# Altium PCB PCB1.PcbDoc
Units mm, origin at the board's own origin, x right, y up, seen from the top; angles counter-clockwise.
Board outline 63.4 x 39.3 mm, 2 copper layers (Top Layer, Bottom Layer); 18 components, 24 nets, 78 pads, 2 vias.
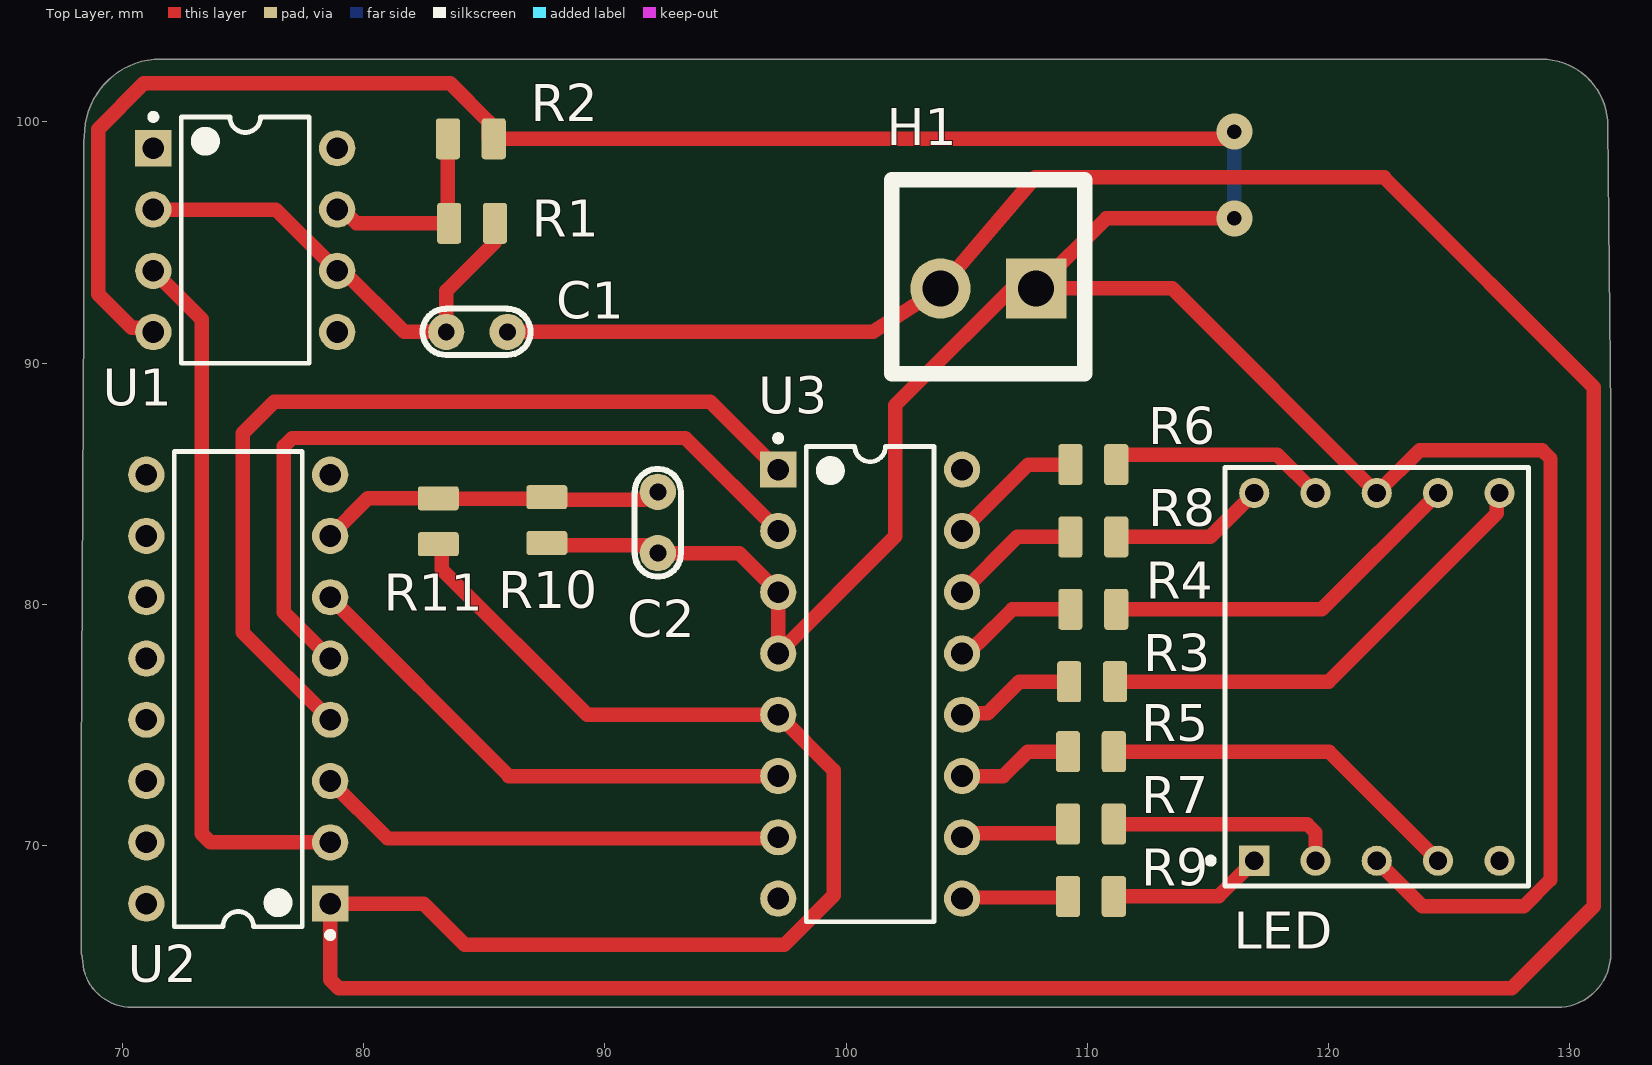
[diagram p0: Top Layer view]
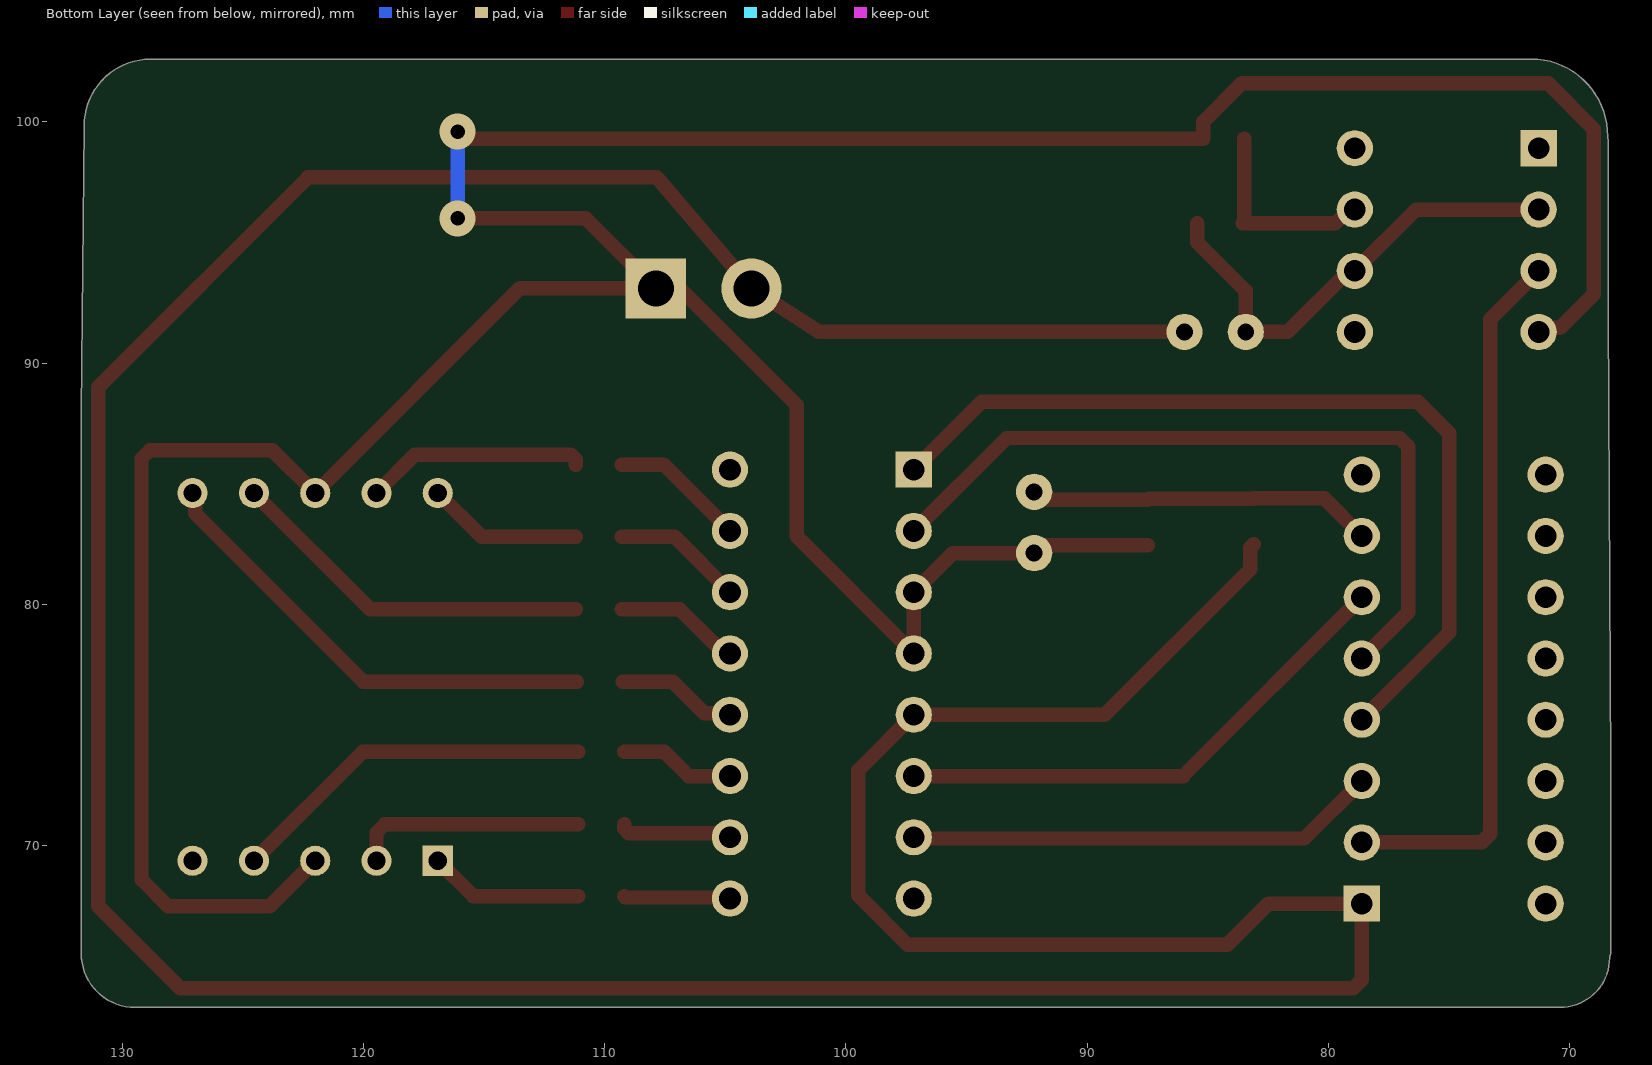
[diagram p1: Bottom Layer view, seen from below]
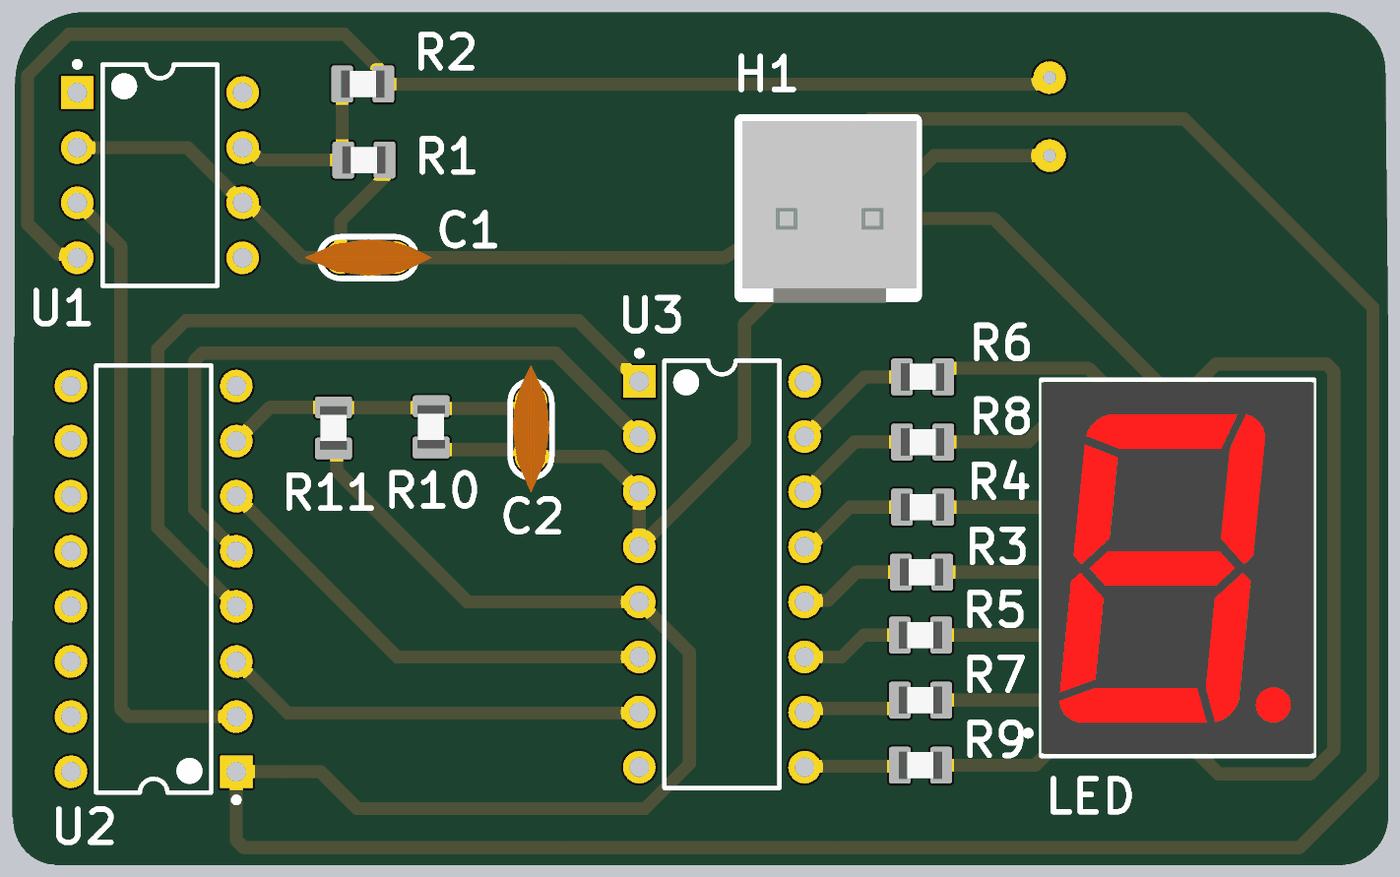
[diagram p2: 3D render of the assembled board from above, using the file's embedded part models]

## Layer stack, top to bottom
Top Solder: solder mask 0.0102, Solder Resist, Dk 3.5
Top Layer: signal copper 0.0356
Dielectric 1: dielectric 0.32, FR-4, Dk 4.8
Bottom Layer: signal copper 0.0356
Bottom Solder: solder mask 0.0102, Solder Resist, Dk 3.5

## Board outline
68.3,65.519 68.3,73.249 68.4,92.048 68.4,92.05 68.4,99.26 ccw(c68.135,99.4) 68.435,99.4 68.435,99.403 cw(c71.623,99.426) 71.328,102.601 71.4,102.6 128.826,102.6 cw(c128.826,99.846) 131.579,99.846 131.579,99.843 131.7,87.998 131.7,65.54 cw(c129.46,65.54) 129.46,63.3 70.405,63.3 cw(c70.405,65.357) 68.348,65.357 ccw(c68.047,65.357)

## Design rules (kind name [scope] priority, off if disabled: settings)
Clearance [All] p1: gap=0.254 ignorepadtopadclearanceinfootprint=FALSE
PolygonConnect [All] p1: connectstyle=Relief reliefconductorwidth=0.254 reliefentries=4 polygonreliefangle="90 Angle" airgapwidth=0.254
RoutingVias [All] p1: holewidth=0.711 width=1.27 viastyle="Through Hole" minholewidth=0.711 minwidth=1.27 maxholewidth=0.711 maxwidth=1.27
SolderMaskExpansion [All] p1: expansion=0.102 istentingtop=FALSE
SupplyNets "Schematic Supply Nets_1" [InNet('VCC')] p1: voltage=0.000
SupplyNets "Schematic Supply Nets" [InNet('GND')] p2: voltage=0.000
Width [All] p1: maxlimit=0.6 minlimit=0.6 preferedwidth=0.6
30 further rules are at their usual default settings.

## Classes and differential pairs
component class Sheet1: C1 C2 LED R2 R3 R4 R5 R6 R7 R8 R9 R10 R11 U1 U2 U3

## Components (designator, comment, footprint, x,y, rotation, side; value= is the part's Value field where it differs from the comment)
C1 "4.7uF" "tu gom" 84.7,91.3 r0 top
C2 "4.7uF" "tu gom" 92.2,83.4 r90 top
H1 "Header Duc Thang" VH3.96M-2 105.9,93.1 r180 top
LED "LED" FP-HDSP-H153-MFG 122,77 r0 top (schematic designator DS1)
R1 "82K" RES_0805 84.5,95.8 r0 top
R2 "1.5K" RES_0805 84.45,99.3 r0 top
R3 "470" RES_0805 110.2,76.8 r0 top
R4 "470" RES_0805 110.25,79.8 r0 top
R5 "470" RES_0805 110.15,73.9 r180 top
R6 "470" RES_0805 110.25,85.8 r0 top
R7 "470" RES_0805 110.15,70.9 r180 top
R8 "470" RES_0805 110.25,82.8 r0 top
R9 "470" RES_0805 110.15,67.9 r180 top
R10 "32K" RES_0805 87.6,83.5 r270 top
R11 "6.8K" RES_0805 83.1,83.45 r90 top
U1 "LM55" P0008A 75.1,95.1 r0 top
U2 "4518" N0016A 74.81,76.49 r180 top
U3 "7447" N0016A 101,76.7 r0 top

## Footprints (in the part's own frame and the unit in brackets; to place one, negate y for a bottom-side part, rotate by r counter-clockwise, add the part's x,y. Pads: shape width x height; smd on the part's side, far side on the other; paste and mask are expansions set on the pad)
FP-HDSP-H153-MFG [mm]
  rect 1.25x1.25 hole 0.75 paste-2539.97 mask+0: 1(-5.08,-7.62)
  round 1.25 hole 0.75 paste-2539.97 mask+0: 2(-2.54,-7.62) 3(0,-7.62) 4(2.54,-7.62) 5(5.08,-7.62) 6(5.08,7.62) 7(2.54,7.62) 8(0,7.62) 9(-2.54,7.62) 10(-5.08,7.62)
  silkscreen extent -7.01,-8.68 6.29,8.68, body extent -6.39,-8.77 6.39,8.77, height 0.25
N0016A [mm] "DIP, 16-Leads, Body 19.7x6.6mm, Pitch 2.54mm"
  rect 1.5x1.5 hole 0.9: 1(-3.81,8.89)
  round 1.5 hole 0.9: 2(-3.81,6.35) 3(-3.81,3.81) 4(-3.81,1.27) 5(-3.81,-1.27) 6(-3.81,-3.81) 7(-3.81,-6.35) 8(-3.81,-8.89) 9(3.81,-8.89) 10(3.81,-6.35) 11(3.81,-3.81) 12(3.81,-1.27) 13(3.81,1.27) 14(3.81,3.81) 15(3.81,6.35) 16(3.81,8.89)
  silkscreen extent -3.94,-9.85 2.65,10.31, body extent -3.95,-9.85 3.95,9.85, height 5.08
P0008A [mm] "DIP, 8-Leads, Body 10.15x6.6mm, Pitch 2.54mm"
  rect 1.5x1.5 hole 0.9: 1(-3.81,3.81)
  round 1.5 hole 0.9: 2(-3.81,1.27) 3(-3.81,-1.27) 4(-3.81,-3.81) 5(3.81,-3.81) 6(3.81,-1.27) 7(3.81,1.27) 8(3.81,3.81)
  silkscreen extent -3.93,-5.1 2.65,5.23, body extent -3.95,-5.07 3.95,5.07, height 5.08
RES_0805 [mm]
  rrect25% 1x1.7 smd: 1(-0.95,0) 2(0.95,0)
  body extent -1,-0.63 1,0.63, height 0.47
"tu gom" [mm] "Tu gom mini"
  round 1.5 hole 0.7: 1(-1.27,0) 2(1.27,0)
  silkscreen extent -2.25,-0.97 2.22,0.97, body extent -2.92,-0.85 2.92,0.85, height 6.12
VH3.96M-2 [mm]
  rect 2.5x2.5 hole 1.5: 1(-1.98,0)
  round 2.5 hole 1.5: 2(1.98,0)
  silkscreen extent -4,-4.5 4,3.54, body extent -4.08,-4.49 3.96,3.88, height 10.26

## Part data
C1 C2: library part "Tu gom 472 50V", "Cắm", Chung_Loai=Cắm, Don_Vi=Con, Ma_Hang=MH004777, So_Chan=2, Ten_Linh_Kien="Tụ gốm 472-4.7nF 50V"
H1: library part "Header 2P VH3.96 Duc Thang", "Cắm", Chung_Loai=Cắm, Don_Vi=Con, Ma_Hang=MH001283, Ten_Linh_Kien="Header 2P XH2.54-2P Đực Thẳng"
LED: library part CMP-18395-000002-1, "LED 7-SEG 14.2MM CC RED RHD RHD", Forward Current=100mA, Forward Voltage=2V, Manufacturer=Broadcom, Manufacturer Part Number=HDSP-H153, Power Dissipation=96mW, Reverse Voltage=15V, Temperature="-20°C to +100°C", Temperature Range High=+100°C, Temperature Range Low=-20°C, Automotive=No, Category=Disp, ComponentLink2Description=Datasheet, ComponentLink2URL=https://docs.broadcom.com/docs/AV02-1107EN, Device Class L1=Optoelectronics, Device Class L2=Displays, Device Class L3="LED Displays", Digikey Description="LED 7-SEG 14.2MM CC RED RHD RHD", Display Type=LED, Element Config="Common Cathode", Height=8mm, Lead Free=Yes, Luminous Intensity=16mcd, Octopart=https://octopart.com/hdsp-h153-broadcom-71129578, Package=HDSP-H153, RoHS=TRUE, Standoff Height=1.14mm, Test Current=100mA, Viewing Angle=100°, Wavelength=637nm
R1 R2 R3 R4 R5 R6 R7 R8 R9 R10 R11: library part RES_0805, "Resistor SMD 0805"
U1: library part CMP-2000-04954-1, "Precision Timer, 4.5 to 16 V, 0 to 70 degC, 8-Pin DIP, Pb-Free, Tube", Manufacturer=TexasInstruments, Maximum High Level Output Current=-200mA, Maximum Low Level Output Current=200mA, Operating Supply Voltage=5, Package=8PDIP, Package Description="8-Pin Double In-line Package, Body 9.59 x 6.35 mm, Pitch 2.54 mm", Package Reference=P8, Category=Timer, Datasheet URL=http://www.ti.com/general/docs/lit/getliterature.tsp?genericPartNumber=NE555&fileType=pdf, Datasheet Version="Rev. I, 09/2014", Manufacturer URL=http://www.ti.com/, Number of Internal Timers=1, Package URL=http://www.ti.com/lit/ml/mpdi001b/mpdi001b.pdf, Packaging=Rail/Tube, Rad Hard=No, Type=Standard
U2: library part CMP-1623-00558-2, "CMOS Dual BCD Up-Counter, N0016A, TUBE", F @ Nom Voltage(Max)(Mhz)=8, Generic Part Number=CD4518B, ICC @ Nom Voltage(Max)(mA)=0.03, Manufacturer="Texas Instruments", Operating Temperature Range(C)="-55 to 125", Rating=Catalog, tpd @ Nom Voltage(Max)(ns)=230, Voltage(Nom)(V)=5,10,15, Bits(#)=4, Code_JEDEC=MS-001, DatasheetVersion=SCHS076D, Function=Counter, Input Type=CMOS, Inputs=1, Output Drive (IOL/IOH)(Max)(mA)=1.5/-1.5, Output Type=CMOS, PackageReference=N0016A, Schmitt Trigger=No, Technology Family=CD4000, Type=Other, VCC(Max)(V)=18, VCC(Min)(V)=3
U3: library part CMP-0388-00321-2, "BCD-to-7-Segment Decoder / Driver, 4.75 to 5.25 V, 0 to 70 degC, 16-pin DIP (N16), Pb-Free (RoHS)", Manufacturer="Texas Instruments", PartNumber=SN7447AN, Code_JEDEC=MS-001, ComponentLink1Description="Manufacturer URL", ComponentLink1URL=http://www.ti.com/, ComponentLink2Description=Datasheet, ComponentLink2URL=http://www.ti.com/general/docs/lit/getliterature.tsp?genericPartNumber=SN7447A&fileType=pdf, ComponentLink3Description="Package Specification", ComponentLink3URL=http://www.ti.com/litv/pdf/mpdi002c, DatasheetVersion=SDLS111, Eco-Plan="Pb-Free (RoHS)", Mounting Technology="Through Hole", PackageDescription="16-Pin Plastic In-Line, Body 19.305 x 6.35 mm, Pitch 2.54 mm", PackageReference=N0016A, PackageVersion=4040049/E, SubFamily="Discrete Segment LED Driver", Vin(Max)(V)=5.25, Vin(Min)(V)=4.75

## Via types
v1: diameter 1.5, hole 0.6, Top Layer to Bottom Layer, 2 vias

## Nets (pads, with @x,y where several pads share a name; then routed paths per layer and width w, separated by ;. In a path a pad name is that pad's centre, name@x,y a point inside that pad or via, vN(x,y) a via of type N, cw(c..) or ccw(c..) an arc to the next point about the centre after c; other vN are vias at no path point)
GND: C1.2 H1.2 R11.1 U2.1 U3.5 | length 178.3
  Top Layer w0.6: R11.1 83.249,82.352 83.249,81.451 89.27,75.43 U3.5 99.5,73.12 99.5,67.951 97.449,65.9 84.2,65.9 82.5,67.6 U2.1 78.62,64.451 78.971,64.1 127.6,64.1 131,67.5 131,89 122.3,97.7 107.841,97.7 H1.2 101.12,91.3 C1.2
NetC1_1: C1.1 R1.2 U1.2 U1.6 | length 19.6
  Top Layer w0.6: U1.2 76.37,96.37 U1.6 79.154,93.83 81.684,91.3 C1.1 83.43,92.994 85.45,95.014 R1.2
NetC2_2: C2.2 R10.1 R11.2 U2.7 | length 14.3
  Top Layer w0.6: U2.7 80.18,84.4 R11.2 83.125,84.375 R10.1@87.475,84.375 ; R10.1@87.5,84.35 91.636,84.35 91.956,84.67 C2.2
NetDS1_1: LED.1 R9.1 | length 6.4
  Top Layer w0.6: R9.1 115.44,67.9 LED.1
NetDS1_2: LED.2 R7.1 | length 9.7
  Top Layer w0.6: R7.1 119.109,70.9 119.46,70.549 LED.2
NetDS1_4: LED.4 R5.1 | length 15.3
  Top Layer w0.6: R5.1 120.02,73.9 LED.4
NetDS1_6: LED.6 R3.2 | length 19.6
  Top Layer w0.6: R3.2 120,76.8 126.972,83.772 126.972,84.512 LED.6
NetDS1_7: LED.7 R4.2 | length 15.3
  Top Layer w0.6: R4.2 119.72,79.8 LED.7
NetDS1_9: LED.9 R6.2 | length 9.2
  Top Layer w0.6: R6.2 111.2,86 111.4,86.2 117.88,86.2 LED.9
NetDS1_10: LED.10 R8.2 | length 6.5
  Top Layer w0.6: R8.2 115.1,82.8 LED.10
NetR1_1: R1.1 R2.1 U1.7 | length 8.4
  Top Layer w0.6: U1.7 79.141,96.37 79.711,95.8 R1.1 ; R2.1 83.5,95.854 R1.1@83.55,95.804
NetR3_1: R3.1 U3.12 | length 5
  Top Layer w0.6: U3.12 104.878,75.498 105.875,75.498 107.177,76.8 R3.1
NetR4_1: R4.1 U3.13 | length 5.2
  Top Layer w0.6: U3.13 105.054,77.97 105.49,78.407 105.507,78.407 106.9,79.8 R4.1
NetR5_2: R5.2 U3.11 | length 4.8
  Top Layer w0.6: U3.11 106.522,72.89 107.532,73.9 R5.2
NetR6_1: R6.1 U3.15 | length 5.6
  Top Layer w0.6: U3.15 107.56,85.8 R6.1
NetR7_2: R7.2 U3.10 | length 4.7
  Top Layer w0.6: U3.10 104.982,70.522 109,70.522 109.2,70.722 R7.2
NetR8_1: R8.1 U3.14 | length 5.4
  Top Layer w0.6: U3.14 107.1,82.8 R8.1
NetR9_2: R9.2 U3.9 | length 4.4
  Top Layer w0.6: U3.9 104.855,67.855 109.155,67.855 R9.2
NetU1_3: U1.3 U2.2 | length 29.6
  Top Layer w0.6: U1.3 73.3,91.82 73.3,70.491 73.651,70.14 U2.2
NetU2_3: U2.3 U3.7 | length 19.6
  Top Layer w0.6: U2.3 81,70.3 97.14,70.3 U3.7
NetU2_4: U2.4 U3.1 | length 37.3
  Top Layer w0.6: U2.4 75,78.84 75,87.1 76.3,88.4 94.38,88.4 95.68,87.1 U3.1
NetU2_5: U2.5 U3.2 | length 31.8
  Top Layer w0.6: U2.5 76.7,79.68 76.7,86.549 77.051,86.9 93.34,86.9 U3.2
NetU2_6: U2.6 U3.6 | length 21.6
  Top Layer w0.6: U2.6 86.03,72.89 U3.6
VCC: C2.1 H1.1 LED.3 LED.8 R2.2 R10.2 U1.4 U3.3 U3.4 | length 157.1
  Top Layer w0.6: U1.4 71.118,91.462 70.389,91.462 69,92.851 69,99.7 70.9,101.6 83.6,101.6 85.2,100 85.2,99.3 115.556,99.3 115.856,99.6 v1(116.1,99.6) ; R10.2@87.5,82.45 87.6,82.45 91.636,82.45 91.956,82.13 C2.1 95.57,82.13 U3.3 U3.4 102.046,82.826 102.046,88.266 H1.1@107.68,93.9 ; v1(116.1,96) 110.78,96 H1.1 113.52,93.1 LED.8 123.78,86.4 128.849,86.4 129.2,86.049 129.2,68.6 128.1,67.5 123.88,67.5 LED.3
  Bottom Layer w0.6: v1(116.1,96) v1(116.1,99.6)
pads on no net: LED.5 U1.1 U1.5 U1.8 U2.8 U2.9 U2.10 U2.11 U2.12 U2.13 U2.14 U2.15 U2.16 U3.8 U3.16

## Silkscreen, mask and mechanical layers (free items; w line width, h text height)
Mechanical 1:
  lines w0.6: 68,65.4 68,73.25 68.1,92.05 68.1,99.3 ; 68.047,65.357 ccw(c70.405,65.357) 70.405,63 129.46,63 ccw(c129.46,65.54) 132,65.54 132,88 131.879,99.846 ccw(c128.826,99.846) 128.826,102.9 71.4,102.9 ; 68.135,99.4 cw(c71.623,99.426) 71.3,102.9